# EAGLE board Main (EAGLE 8.6.1)
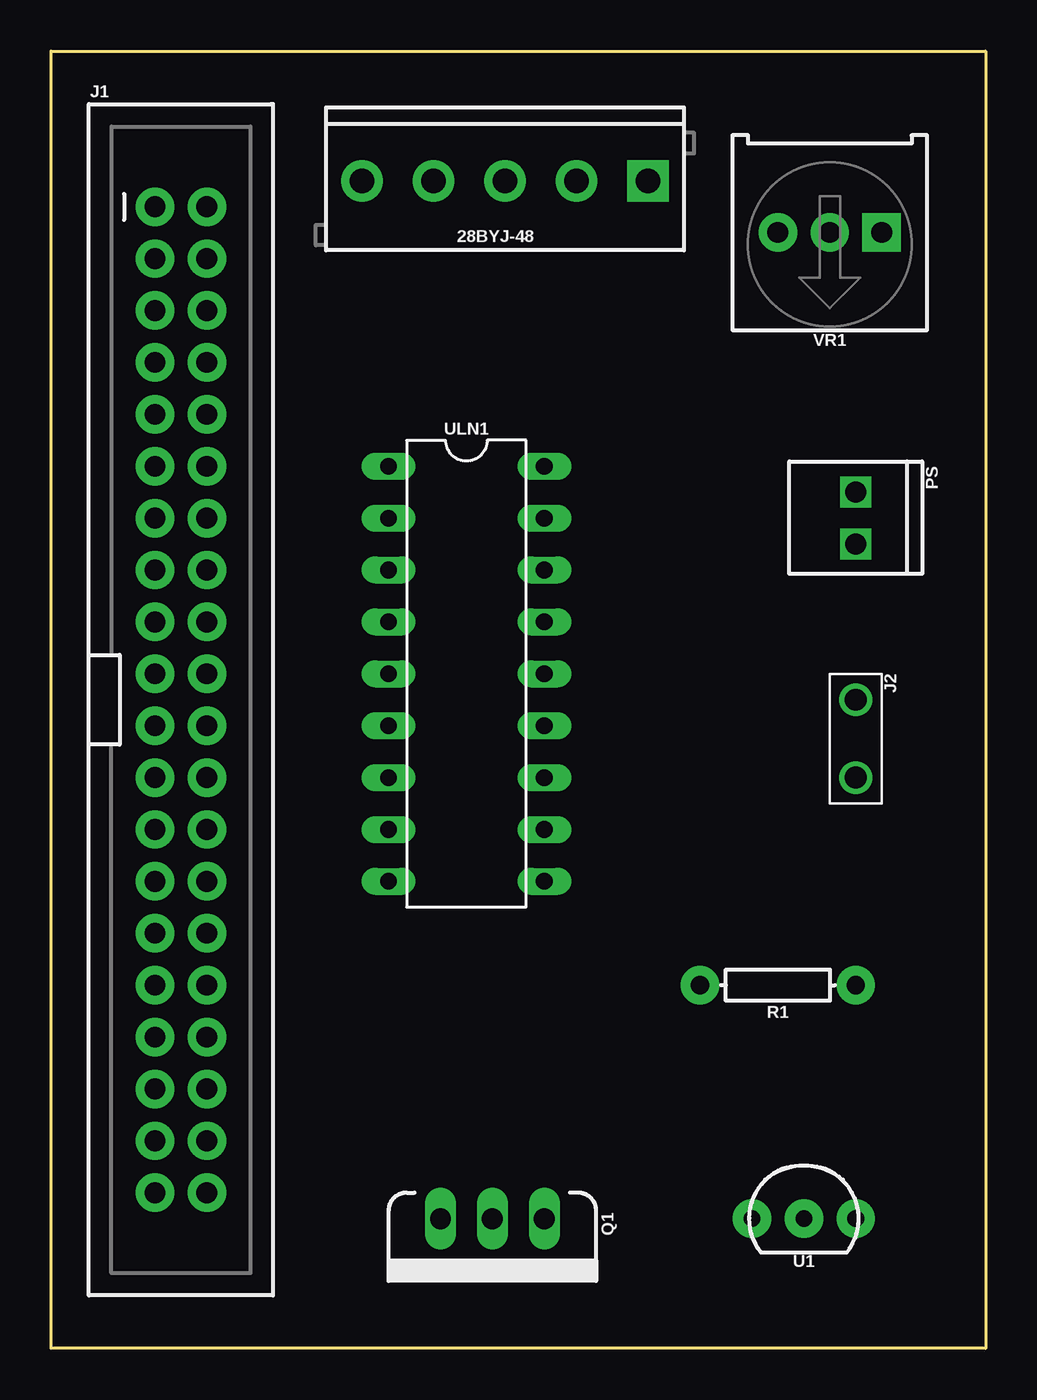
[diagram p0: board, top side]
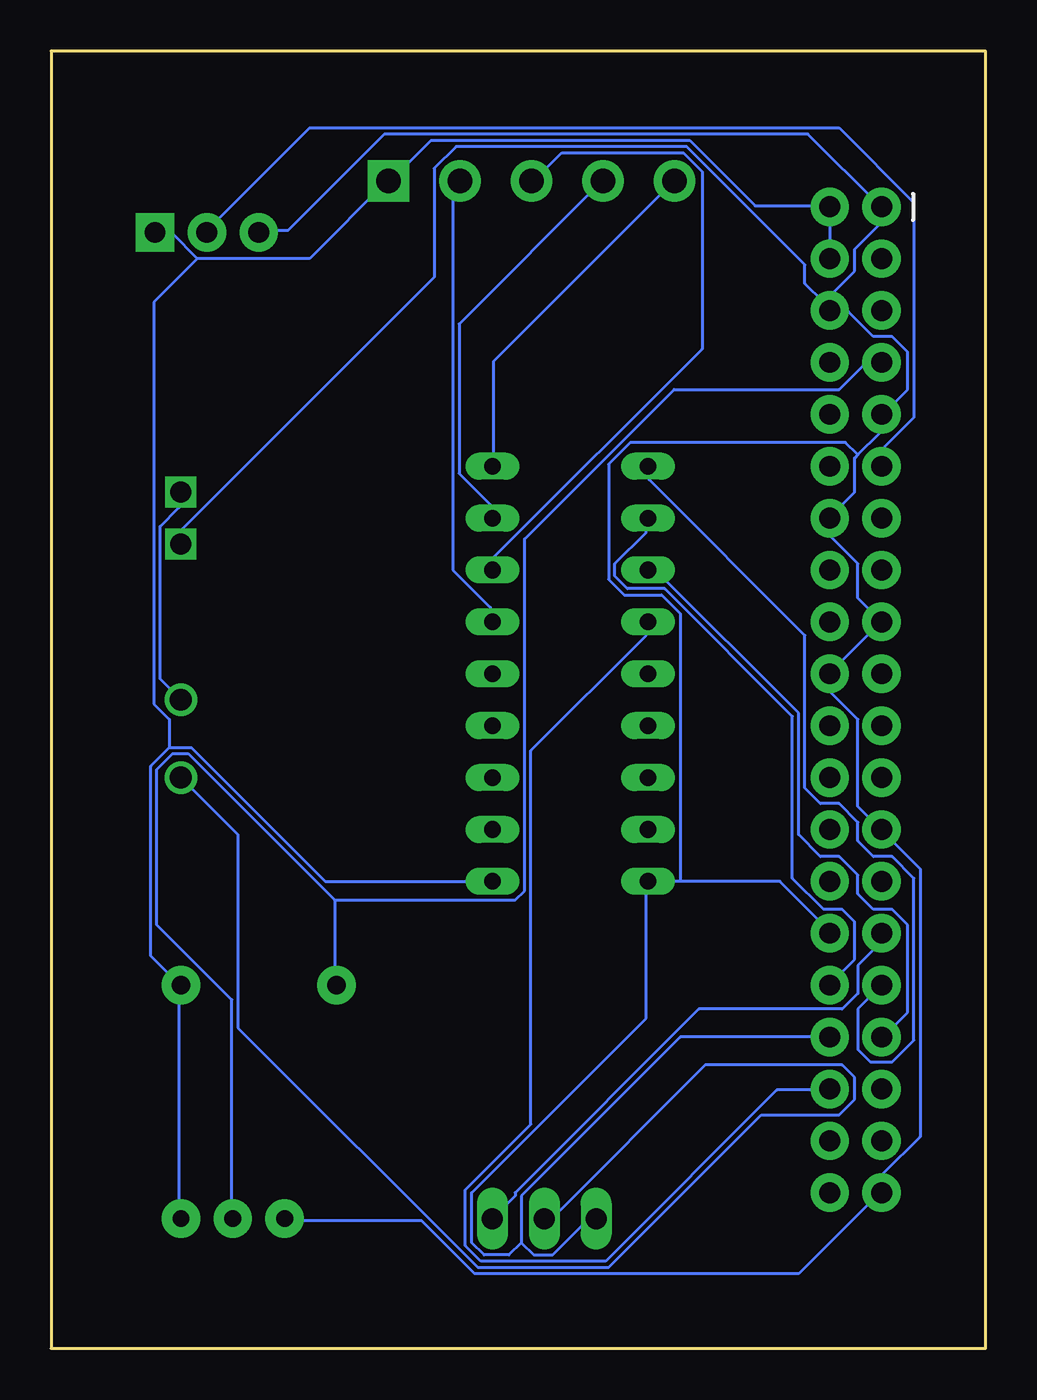
[diagram p1: board, bottom side, seen from below]

Size 45.72 x 63.5 mm. Coordinates in mm from the lower left corner, seen from the top.
Outline: 0,0 0,63.5 45.72,63.5 45.72,0 0,0
Copper layers (1*16): Top 0.035mm / dielectric 1.5mm / Bottom 0.035mm
Design rules "default": minimum track width 6mil, minimum drill 0.35mm, track to track 6mil, track to pad 6mil, pad to pad 6mil, via to via 6mil, smd to smd 6mil, copper to edge 40mil, drill to drill 6mil, minimum pad ring 10mil, minimum via ring 8mil, stop-mask expansion 4mil, vias tented up to drill 0mil, thermal gap 10mil

## Footprints (pad centres in the part's own frame; a part is rotated, then mirrored left to right if it is on the bottom)
SCREWTERMINAL-3.5MM-5 = drill 1.2 pad 2.032 square: 1 0,0 | drill 1.2 pad 2.032: 2 3.5,0; 3 7,0; 4 10.5,0; 5 14,0
2X20_SHROUDED = drill 1.016 pad 1.88: 1 -1.27,24.13; 2 1.27,24.13; 3 -1.27,21.59; 4 1.27,21.59; 5 -1.27,19.05; 6 1.27,19.05; 7 -1.27,16.51; 8 1.27,16.51; 9 -1.27,13.97; 10 1.27,13.97; 11 -1.27,11.43; 12 1.27,11.43; 13 -1.27,8.89; 14 1.27,8.89; 15 -1.27,6.35; 16 1.27,6.35; 17 -1.27,3.81; 18 1.27,3.81; 19 -1.27,1.27; 20 1.27,1.27; 21 -1.27,-1.27; 22 1.27,-1.27; 23 -1.27,-3.81; 24 1.27,-3.81; 25 -1.27,-6.35; 26 1.27,-6.35; 27 -1.27,-8.89; 28 1.27,-8.89; 29 -1.27,-11.43; 30 1.27,-11.43; 31 -1.27,-13.97; 32 1.27,-13.97; 33 -1.27,-16.51; 34 1.27,-16.51; 35 -1.27,-19.05; 36 1.27,-19.05; 37 -1.27,-21.59; 38 1.27,-21.59; 39 -1.27,-24.13; 40 1.27,-24.13
1X02_BIG = drill 1.067: P$1 0,0; P$2 3.81,0
1X02_2.54_SCREWTERM = drill 1.016 square: P1 2.54,0; P2 0,0
TO220V = drill 1.016 long: 1 -2.54,0; 2 0,0; 3 2.54,0
AXIAL-0.3 = drill 0.9 pad 1.88: P$1 -3.81,0; P$2 3.81,0
TO-92-AMMO = drill 0.813 pad 1.88: 1 -2.54,0; 2 0,0; 3 2.54,0
DIL18 = drill 0.813 long: 1 -10.16,-3.81; 2 -7.62,-3.81; 3 -5.08,-3.81; 4 -2.54,-3.81; 5 0,-3.81; 6 2.54,-3.81; 7 5.08,-3.81; 8 7.62,-3.81; 9 10.16,-3.81; 10 10.16,3.81; 11 7.62,3.81; 12 5.08,3.81; 13 2.54,3.81; 14 0,3.81; 15 -2.54,3.81; 16 -5.08,3.81; 17 -7.62,3.81; 18 -10.16,3.81
TRIMPOT-PTH-3386U = drill 1.016 pad 1.88 square: 1 -2.54,-0.015 | drill 1.016 pad 1.88: 2 0,-0.015; 3 2.54,-0.015

## Placement (x,y rotation side)
28BYJ-48  [SCREWTERMINAL-3.5MM-5]  29.21,57.15 180 top
J1  RASPBERRYPI-40-PIN-GPIO_PTH  [2X20_SHROUDED]  6.35,31.75 0 top
J2  Heating_element  [1X02_BIG]  39.37,31.75 270 top
PS  Vin  [1X02_2.54_SCREWTERM]  39.37,41.91 270 top
Q1  60V/32A/35mΩ  [TO220V]  21.59,6.35 180 top
R1  4K7  [AXIAL-0.3]  35.56,17.78 180 top
U1  DS18B20  [TO-92-AMMO]  36.83,6.35 0 top
ULN1  [DIL18]  20.32,33.02 270 top
VR1  10k  [TRIMPOT-PTH-3386U]  38.1,54.61 180 top

## Library data of the parts
28BYJ-48 = SparkFun-Connectors; PROD_ID: Combine 8288+8399; SPICEPREFIX: X
J1 = SparkFun-Connectors; PROD_ID: CONN-12263; SF_ID: PRT-13054
J2 PS = SparkFun-Connectors
Q1 = SparkFun-DiscreteSemi; PROD_ID: TRANS-10060
R1 = SparkFun-Resistors
U1 = SparkFun-Sensors; SPICEPREFIX: U; STORE_ID: SEN-00245
ULN1 = SparkFun-IC-Special-Function
VR1 = SparkFun-Resistors; PROD_ID: RES-09730; SF_SKU: COM-09806

## Nets
5V: 28BYJ-48.1 J1.2 J1.4 R1.P$1 U1.3 ULN1.10 VR1.1
GND: J1.1 J1.6 J1.9 J1.14 J1.17 J1.20 J1.25 J1.30 J1.34 J1.39 PS.P1 Q1.3 U1.1 ULN1.9 VR1.3
N$1: J1.7 R1.P$2 U1.2
N$2: J1.31 ULN1.1
N$3: J1.29 Q1.1
N$4: J1.33 ULN1.3
N$7: J1.11 VR1.2
N$8: J2.P$2 Q1.2
N$10: J1.32 ULN1.2
N$12: J1.36 ULN1.4
N$13: 28BYJ-48.5 ULN1.18
N$14: 28BYJ-48.4 ULN1.17
N$15: 28BYJ-48.3 ULN1.16
N$16: 28BYJ-48.2 ULN1.15
VCC_12V: J2.P$1 PS.P2

## Tracks (layer width: path | path; a pad name or v marks a point on that pad's centre or on a via)
5V
  Bottom 0.152: ULN1.10 32.31,22.86 38.86,29.41 39.93,29.41 | 39.93,29.41 40.84,28.5 40.84,19.2 39.47,17.83 R1.P$1 39.47,17.68 39.47,6.4 U1.3 | J1.4 J1.2 7.62,55.93 11.28,55.93 14.48,59.13 27.13,59.13 29.11,57.15 28BYJ-48.1 29.26,57.15 33.07,53.34 38.56,53.34 | 38.56,53.34 39.78,54.56 40.54,54.56 VR1.1 | 39.93,29.41 39.93,30.79 40.69,31.55 40.69,51.21 38.56,53.34
GND
  Bottom 0.152: 7.92,51.21 7.62,50.9 J1.6 | 7.92,51.21 8.84,52.12 8.84,53.03 14.63,58.83 25.91,58.83 26.98,57.76 26.98,52.43 39.32,40.08 39.32,39.47 PS.P1 | 7.92,51.21 6.4,52.73 6.4,53.8 5.18,55.02 5.18,55.78 J1.1 5.18,55.93 8.69,59.44 29.41,59.44 34.14,54.71 35.51,54.71 VR1.3 | 7.92,51.21 J1.6 | 14.94,22.86 10.06,22.86 7.62,20.42 J1.30 | 14.94,22.86 ULN1.9 16.61,22.86 16.61,16.15 25.15,7.62 25.15,5.18 24.54,4.57 23.32,4.57 22.71,5.18 | 22.71,5.18 22.1,4.57 21.18,4.57 19.51,6.25 19.05,6.25 Q1.3 | 22.71,5.18 22.71,7.47 14.94,15.24 J1.34 | 6.25,43.74 6.4,43.59 6.4,41.91 7.62,40.69 J1.14 7.62,39.78 6.25,38.41 6.25,36.73 J1.17 5.18,35.51 7.62,33.07 J1.20 7.62,32.16 6.25,30.79 6.25,26.52 5.18,25.45 J1.25 5.03,25.3 3.2,23.47 3.2,10.36 5.03,8.53 5.03,7.62 J1.39 5.18,7.62 9.14,3.66 24.99,3.66 27.58,6.25 34.29,6.25 U1.1 | 6.25,43.74 5.18,44.81 5.18,45.72 J1.9 5.03,45.72 3.81,46.94 3.81,48.77 4.57,49.53 5.49,49.53 6.71,50.75 7.62,50.75 J1.6 | 14.94,22.86 14.94,35.97 15.85,36.88 17.68,36.88 18.44,37.64 18.44,43.28 17.37,44.35 6.86,44.35 6.25,43.74
N$1
  Bottom 0.152: 31.85,21.95 31.85,17.83 R1.P$2 | 31.85,21.95 39.01,29.11 39.78,29.11 40.54,28.35 40.54,20.73 36.88,17.07 36.88,6.4 U1.2 | 31.85,21.95 23.01,21.95 22.55,22.4 22.55,39.62 15.24,46.94 7.16,46.94 5.94,48.16 5.18,48.16 J1.7
N$2
  Bottom 0.152: J1.31 6.25,16.61 6.25,14.63 5.64,14.02 4.57,14.02 3.5,15.09 3.5,23.01 4.57,24.08 5.49,24.08 6.25,24.84 6.25,25.76 7.16,26.67 8.08,26.67 8.84,27.43 8.84,34.9 16.46,42.52 16.46,43.13 ULN1.1
N$3
  Bottom 0.152: Q1.1 23.01,7.47 23.01,7.62 14.02,16.61 7.01,16.61 6.25,17.37 6.25,18.75 5.18,19.81 5.18,20.27 J1.29
N$4
  Bottom 0.152: ULN1.3 16.15,38.1 9.14,31.09 9.14,25.15 8.08,24.08 7.16,24.08 6.25,23.16 6.25,22.25 5.49,21.49 4.57,21.49 3.81,20.73 3.81,16.46 5.03,15.24 J1.33
N$7
  Bottom 0.152: J1.11 5.03,43.28 5.03,44.04 3.5,45.57 3.5,56.08 7.16,59.74 33.07,59.74 38.1,54.71 VR1.2
N$8
  Bottom 0.152: J2.P$2 36.58,25.15 36.58,15.7 24.84,3.96 18.44,3.96 10.97,11.43 7.16,11.43 6.4,12.19 6.4,13.26 7.01,13.87 13.72,13.87 21.18,6.4 21.49,6.4 Q1.2
N$10
  Bottom 0.152: ULN1.2 16.61,40.54 16.61,39.93 18.14,38.41 18.14,37.8 17.53,37.19 15.7,37.19 9.45,30.94 9.45,23.01 7.92,21.49 7.01,21.49 6.4,20.88 6.4,19.05 7.62,17.83 J1.32
N$12
  Bottom 0.152: ULN1.4 16.61,35.51 16.61,34.9 22.25,29.26 22.25,10.97 25.45,7.77 25.45,5.03 24.69,4.27 18.59,4.27 10.21,12.65 7.62,12.65 J1.36
N$13
  Bottom 0.152: ULN1.18 24.08,43.28 24.08,48.31 15.24,57.15 28BYJ-48.5
N$14
  Bottom 0.152: ULN1.17 24.23,40.69 24.23,41.3 25.76,42.82 25.76,50.14 18.75,57.15 28BYJ-48.4
N$15
  Bottom 0.152: ULN1.16 24.08,38.1 24.08,38.71 13.87,48.92 13.87,57.61 14.78,58.52 20.73,58.52 22.1,57.15 28BYJ-48.3
N$16
  Bottom 0.152: ULN1.15 24.23,35.66 24.23,36.27 26.06,38.1 26.06,56.84 25.76,57.15 28BYJ-48.2
VCC_12V
  Bottom 0.152: J2.P$1 40.39,32.77 40.39,40.23 39.47,41.15 39.47,41.91 PS.P2